# EAGLE board PowerDeliveryBoard (EAGLE 9.5.1)
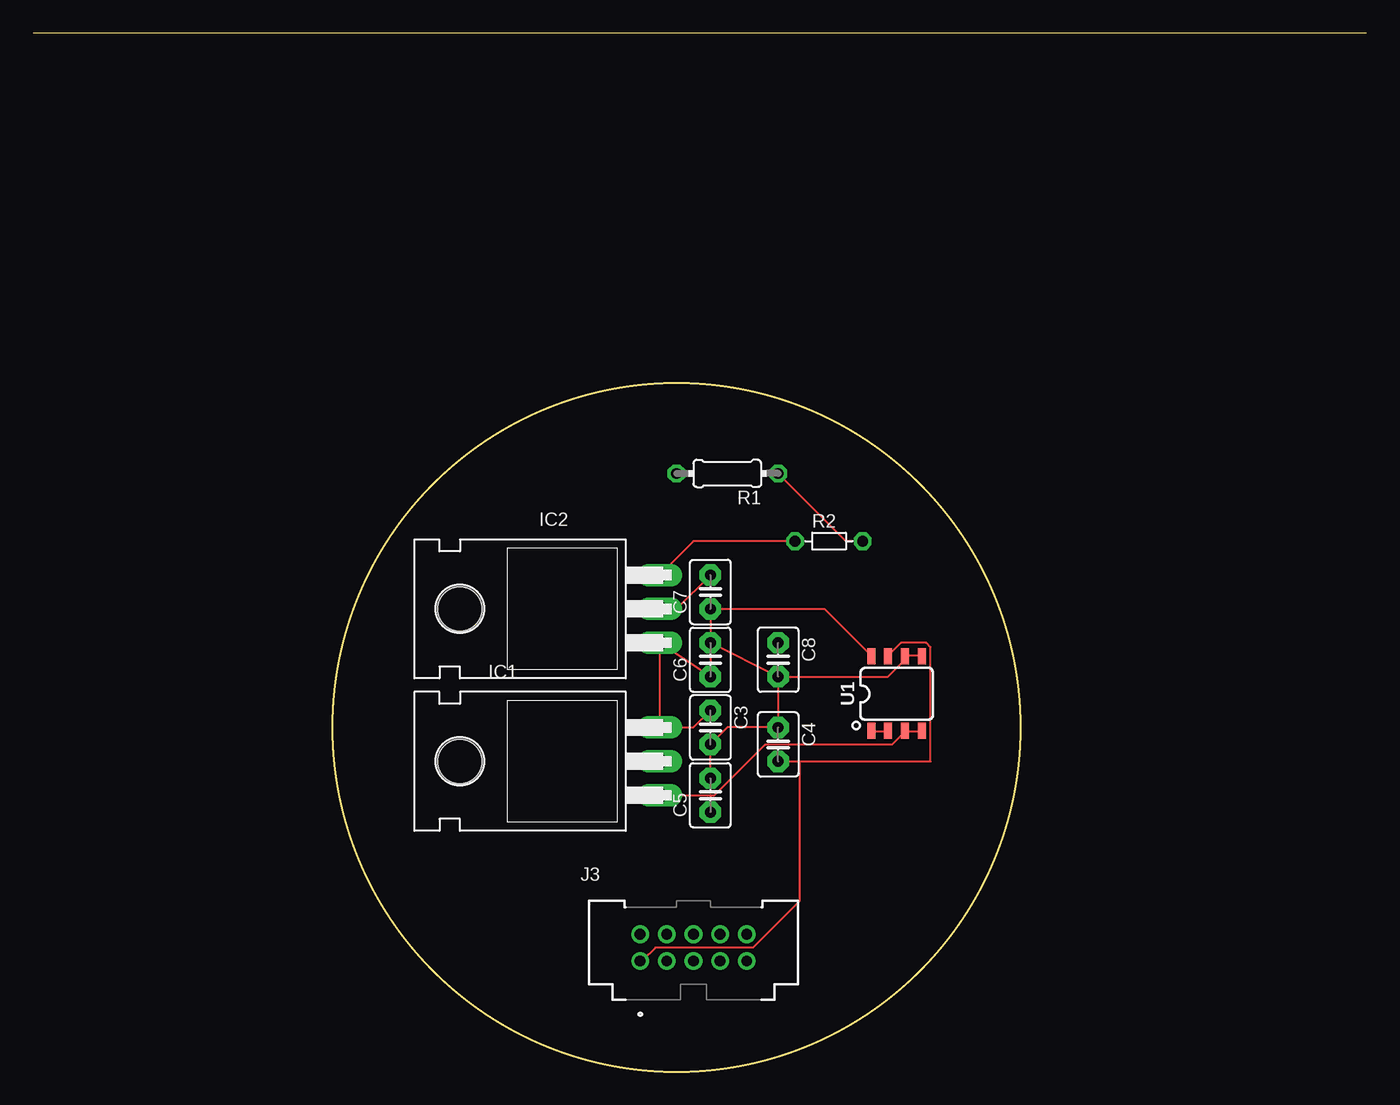
[diagram p0: board, top side]
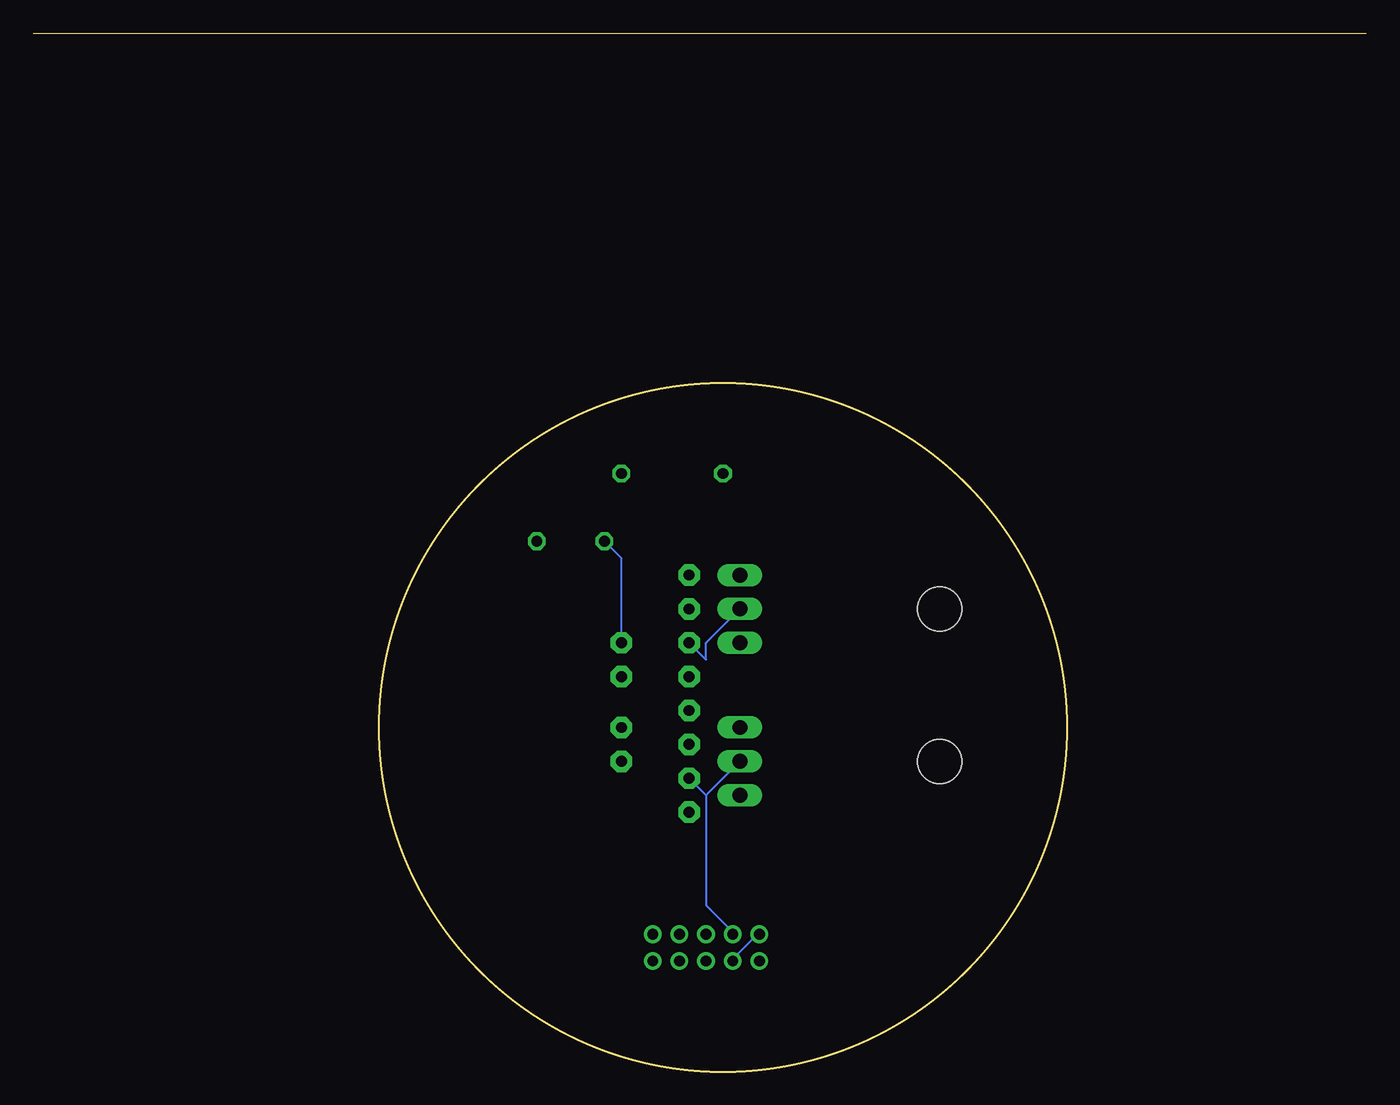
[diagram p1: board, bottom side, seen from below]

Size 100 x 77.87 mm. Coordinates in mm from the lower left corner, seen from the top.
Outline: 100,77.87 0,77.87
Outline: circle at 48.26,25.81 radius 25.81
Copper layers (1*16): Top 0.035mm / dielectric 1.5mm / Bottom 0.035mm
Design rules "default": minimum track width 6mil, minimum drill 0.35mm, track to track 6mil, track to pad 6mil, pad to pad 6mil, via to via 6mil, smd to smd 6mil, copper to edge 40mil, drill to drill 6mil, minimum pad ring 10mil, minimum via ring 8mil, stop-mask expansion 4mil, vias tented up to drill 0mil, thermal gap 10mil

## Footprints (pad centres in the part's own frame; a part is rotated, then mirrored left to right if it is on the bottom)
C2.5-3 = drill 0.813 pad 1.6 octagon: 1 -1.27,0; 2 1.27,0
TO220H = drill 1.118 long: 1 -2.54,-10.16; 2 0,-10.16; 3 2.54,-10.16 | hole 3.302: 0,4.826
SAMTEC_T2M-105-01-X-D-TH = drill 0.813 pad 1.163: 01 -4,-1; 02 -4,1; 03 -2,-1; 04 -2,1; 05 0,-1; 06 0,1; 07 2,-1; 08 2,1; 09 4,-1; 10 4,1
0204/7 = drill 0.813 octagon: 1 -3.81,0; 2 3.81,0
R-5 = drill 0.813 octagon: 1 -2.54,0; 2 2.54,0
SO08 = smd 0.6 x 1.2: 1 -1.905,-2.8; 2 -0.635,-2.8; 3 0.635,-2.8; 4 1.905,-2.8; 5 1.905,2.8; 6 0.635,2.8; 7 -0.635,2.8; 8 -1.905,2.8

## Placement (x,y rotation side)
C3  .1 uF  [C2.5-3]  50.8,25.81 270 top
C4  [C2.5-3]  55.88,24.54 270 top
C5  1uF  [C2.5-3]  50.8,20.73 90 top
C6  .1uF  [C2.5-3]  50.8,30.89 90 top
C7  1uF  [C2.5-3]  50.8,35.97 90 top
C8  .1uF  [C2.5-3]  55.88,30.89 270 top
IC1  7812T  [TO220H]  36.83,23.27 90 top
IC2  7812T  [TO220H]  36.83,34.7 90 top
J3  T2M-105-01-X-D-TH  [SAMTEC_T2M-105-01-X-D-TH]  49.53,9.3 0 top
R1  0  [0204/7]  52.07,44.86 180 top
R2  THERMISTOR-5  [R-5]  59.69,39.78 0 top
U1  GENERIC-SOIC8MSGEQ7N-FILTER  [SO08]  64.77,28.35 0 top

## Library data of the parts
C3-C8 = capacitor-wima
IC1 IC2 = linear
J3 = T2M-105-01-X-D-TH; MANUFACTURER: Samtec; MAXIMUM_PACKAGE_HEIGHT: 6.55mm; PARTREV: AH; STANDARD: Manufacturer Recommendations
R1 = rcl; SPICEPREFIX: R
R2 = varistor
U1 = SparkFun-Retired; PROD_ID: IC-10141

## Nets
0: R1.2
+3V3: C8.1 IC2.3 R2.1
+5V: C3.1 C6.1 C7.1 IC1.3 IC2.1 U1.8
GND: C3.2 C4.1 C5.2 C6.2 C7.2 C8.2 IC1.2 IC2.2 J3.04 U1.5 U1.6
N$1: R1.1 R2.2
V_BATT: C5.1 IC1.1 U1.3 U1.4
V_BATT_IN: U1.1 U1.2
VCC: J3.02 J3.03
VI_OUT: C4.2 J3.01 U1.7

## Tracks (layer width: path | path; a pad name or v marks a point on that pad's centre or on a via)
+3V3
  Top 0.152: IC2.3 49.53,39.78 R2.1
  Bottom 0.152: R2.1 55.88,38.51 C8.1
+5V
  Top 0.152: C3.1 49.53,25.81 IC1.3 IC2.1 C6.1 C7.1 59.37,34.7 62.87,31.2 U1.8
GND
  Top 0.152: C5.2 C3.2 52.07,25.81 C4.1 C8.2 | C7.2 48.26,34.7 IC2.2 | U1.5 66.67,31.2 65.41,31.2 U1.6 65.41,30.89 64.14,29.62 C8.2 | C8.2 C6.2
  Bottom 0.152: 49.53,20.73 49.53,12.47 47.62,10.57 J3.04 | C5.2 49.53,20.73 | 49.53,20.73 IC1.2 | IC2.2 49.53,32.16 49.53,30.89 C6.2
N$1
  Top 0.152: R1.1 60.96,39.78 R2.2
V_BATT
  Top 0.152: 65.41,25.49 66.67,25.49 U1.4 | 65.41,25.49 64.45,24.54 54.93,24.54 51.12,20.73 50.8,20.73 | IC1.1 50.8,20.73 | 65.41,25.49 U1.3 | 50.8,20.73 C5.1
V_BATT_IN
  Top 0.152: U1.1 62.87,25.49 64.14,25.49 U1.2
VCC
  Bottom 0.152: J3.02 45.72,10.25 47.31,8.66 47.31,8.34 J3.03
VI_OUT
  Top 0.152: C4.2 57.47,23.27 | 57.47,23.27 67.31,23.27 67.31,31.84 66.99,32.16 65.09,32.16 64.14,31.2 U1.7 | 57.47,23.27 57.47,12.79 53.98,9.3 46.67,9.3 45.72,8.34 J3.01